# EAGLE board version 2 (EAGLE 6.1)
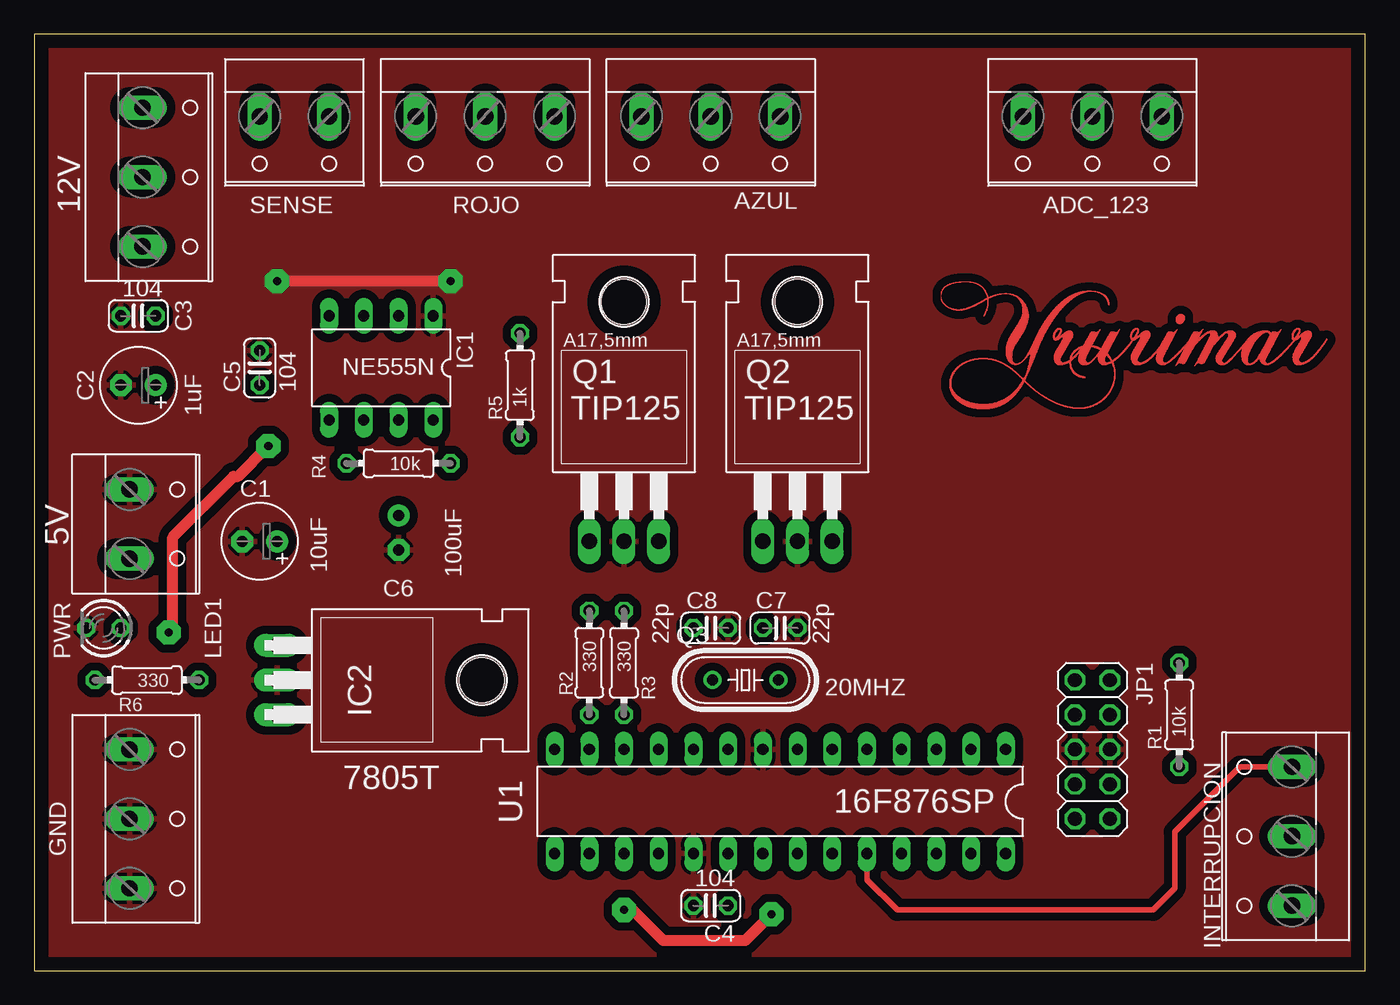
[diagram p0: board, top side]
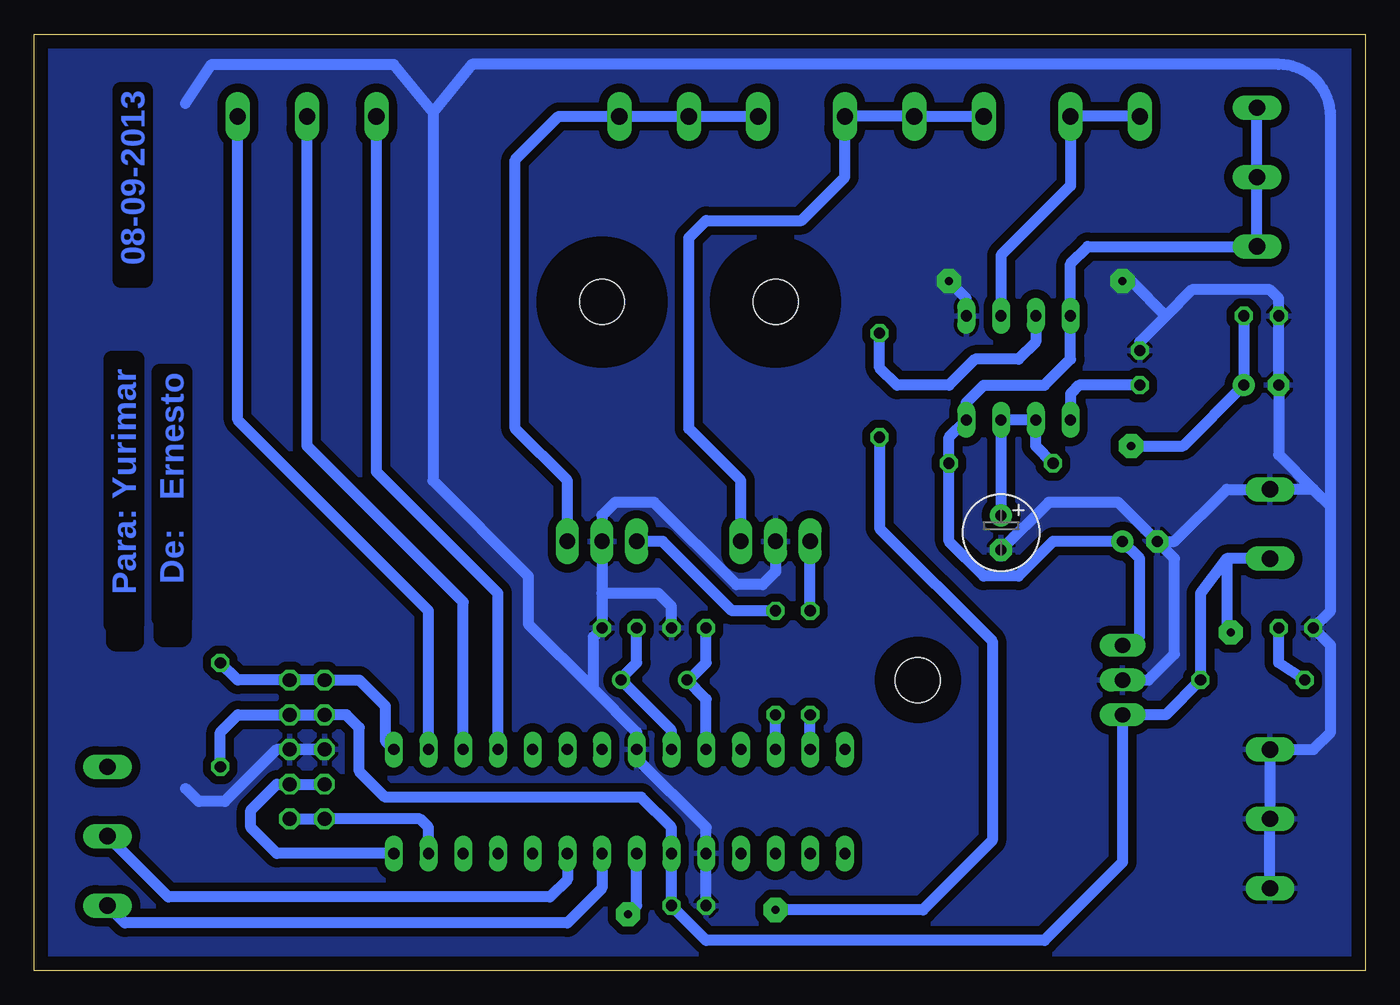
[diagram p1: board, bottom side, seen from below]

Size 97.45 x 68.57 mm. Coordinates in mm from the lower left corner, seen from the top.
Outline: 0,0 97.45,0 97.45,68.57 0,68.57 0,0
Copper layers (1*16): Top 0.035mm / dielectric 1.5mm / Bottom 0.035mm
Design rules: minimum track width 10mil, minimum drill 24mil, track to track 12mil, track to pad 12mil, pad to pad 12mil, via to via 12mil, smd to smd 12mil, copper to edge 40mil, drill to drill 8mil, minimum pad ring 10mil, minimum via ring 8mil, stop-mask expansion 4mil, vias tented up to drill 0mil, thermal gap 10mil

## Footprints (pad centres in the part's own frame; a part is rotated, then mirrored left to right if it is on the bottom)
W237-133 = drill 1.194 long: 1 -5.08,-0.635; 2 0,-0.635; 3 5.08,-0.635
E2,5-6 = drill 0.813 pad 1.6: + -1.27,0 | drill 0.813 pad 1.6 octagon: - 1.27,0
C025-024X044 = drill 0.813 octagon: 1 -1.27,0; 2 1.27,0
DIL08 = drill 0.813 long: 1 -3.81,-3.81; 2 -1.27,-3.81; 3 1.27,-3.81; 4 3.81,-3.81; 5 3.81,3.81; 6 1.27,3.81; 7 -1.27,3.81; 8 -3.81,3.81
TO220H = drill 1.118 long: 1 -2.54,-10.16; 2 0,-10.16; 3 2.54,-10.16 | hole 3.302: 0,4.826
2X05 = drill 1.016 octagon: 1 -5.08,-1.27; 2 -5.08,1.27; 3 -2.54,-1.27; 4 -2.54,1.27; 5 0,-1.27; 6 0,1.27; 7 2.54,-1.27; 8 2.54,1.27; 9 5.08,-1.27; 10 5.08,1.27
LED3MM = drill 0.813 octagon: A -1.27,0; K 1.27,0
W237-132 = drill 1.194 long: 1 -2.54,-0.635; 2 2.54,-0.635
TO220 = drill 1.118 long: 1 -2.54,-6.35; 2 0,-6.35; 3 2.54,-6.35 | hole 3.302: 0,11.176
HC49/S = drill 0.813: 1 -2.413,0; 2 2.413,0
0204/7 = drill 0.813 octagon: 1 -3.81,0; 2 3.81,0
DIL28-3 = drill 0.813 long: 1 -16.51,-3.81; 2 -13.97,-3.81; 3 -11.43,-3.81; 4 -8.89,-3.81; 5 -6.35,-3.81; 6 -3.81,-3.81; 7 -1.27,-3.81; 8 1.27,-3.81; 9 3.81,-3.81; 10 6.35,-3.81; 11 8.89,-3.81; 12 11.43,-3.81; 13 13.97,-3.81; 14 16.51,-3.81; 15 16.51,3.81; 16 13.97,3.81; 17 11.43,3.81; 18 8.89,3.81; 19 6.35,3.81; 20 3.81,3.81; 21 1.27,3.81; 22 -1.27,3.81; 23 -3.81,3.81; 24 -6.35,3.81; 25 -8.89,3.81; 26 -11.43,3.81; 27 -13.97,3.81; 28 -16.51,3.81

## Placement (x,y rotation side)
12V  [W237-133]  8.57,58.1 270 top
ADC_123  [W237-133]  77.47,61.91 180 top
AZUL  [W237-133]  49.53,61.91 180 top
C1  10uF  [E2,5-6]  16.51,31.43 180 top
C2  1uF  [E2,5-6]  7.62,42.86 180 top
C3  104  [C025-024X044]  7.62,47.94 180 top
C4  104  [C025-024X044]  49.53,4.76 180 top
C5  104  [C025-024X044]  16.51,44.13 90 top
C6  100uF  [E2,5-6]  26.67,32.07 270 bottom
C7  22p  [C025-024X044]  54.61,25.08 0 top
C8  22p  [C025-024X044]  49.53,25.08 0 top
GND  [W237-133]  7.62,11.11 270 top
IC1  NE555N  [DIL08]  25.4,44.13 180 top
IC2  7805T  [TO220H]  27.94,21.27 270 top
INTERRUPCION  [W237-133]  91.44,9.84 90 top
JP1  [2X05]  77.47,16.19 270 top
LED1  [LED3MM]  5.08,25.08 180 top
PWR  [W237-132]  7.62,32.7 270 top
Q1  TIP125  [TO220]  43.18,37.78 0 top
Q2  TIP125  [TO220]  55.88,37.78 0 top
Q3  20MHZ  [HC49/S]  52.07,21.27 0 top
R1  10k  [0204/7]  83.82,18.73 90 top
R2  330  [0204/7]  40.64,22.54 270 top
R3  330  [0204/7]  43.18,22.54 270 top
R4  10k  [0204/7]  26.67,37.15 180 top
R5  1k  [0204/7]  35.56,42.86 90 top
R6  330  [0204/7]  8.26,21.27 180 top
ROJO  [W237-133]  33.02,61.91 180 top
SENSE  [W237-132]  19.05,61.91 180 top
U1  16F876SP  [DIL28-3]  54.61,12.38 180 top

## Library data of the parts
12V ADC_123 AZUL GND INTERRUPCION PWR ROJO SENSE = con-wago-508; OC_FARNELL: unknown; OC_NEWARK: unknown
C1-C8 R1-R6 = rcl
IC1 = baiyun
IC2 = linear
JP1 = pinhead
LED1 = led
Q1 Q2 = transistor-pnp
Q3 = crystal; OC_FARNELL: 1667008; OC_NEWARK: unknown
U1 = -redpic-microchip-pic

## Nets
GND: C1.- C2.- C3.2 C4.2 C5.2 C6.- C7.2 C8.2 GND.1 GND.2 GND.3 IC1.1 IC2.2 JP1.5 JP1.6 LED1.K PWR.1 Q1.2 Q2.2 U1.8 U1.19
MCLR: JP1.1 JP1.2 R1.2 U1.1
N$1: C5.1 IC1.5
N$2: INTERRUPCION.3 U1.24
N$5: R2.2 U1.13
N$6: C6.+ IC1.6 IC1.7 R4.2
N$7: IC1.3 R5.2
N$8: R5.1 U1.21
N$9: Q1.1 R2.1
N$10: IC1.2 SENSE.1 SENSE.2
N$11: R3.2 U1.12
N$12: Q2.1 R3.1
N$13: INTERRUPCION.1 U1.22
N$14: INTERRUPCION.2 U1.23
N$16: ADC_123.1 U1.2
N$17: ADC_123.2 U1.3
N$18: ADC_123.3 U1.4
N$21: LED1.A R6.2
N$23: C7.1 Q3.2 U1.9
N$24: C8.1 Q3.1 U1.10
PWM_AZUL: AZUL.1 AZUL.2 AZUL.3 Q2.3
PWM_ROJO: Q1.3 ROJO.1 ROJO.2 ROJO.3
RB6: JP1.9 JP1.10 U1.27
RB7: JP1.7 JP1.8 U1.28
VCC: C2.+ C3.1 C4.1 IC2.3 JP1.3 JP1.4 PWR.2 R1.1 R6.1 U1.20
VDD: 12V.1 12V.2 12V.3 C1.+ IC1.4 IC1.8 IC2.1 R4.1

## Tracks (layer width: path | path; a pad name or v marks a point on that pad's centre or on a via)
GND  (via drill 0.6 pad 1.78)
  Top 0.813: v30.48,50.48 v17.78,50.48
  Bottom 0.813: C4.2 U1.19 48.26,10.48 53.34,15.56 U1.8 53.34,17.46 56.52,20.64 | JP1.6 JP1.5 79.69,16.19 83.5,12.38 85.41,12.38 86.36,13.34 | GND.3 GND.2 GND.1 3.81,16.19 2.54,17.46 2.54,23.81 LED1.K 2.54,26.35 2.54,33.97 | 3.81,35.24 PWR.1 10.16,35.24 13.97,31.43 C1.- | IC2.2 15.88,21.27 13.97,23.18 13.97,30.16 C1.- | 3.81,35.24 6.35,37.78 C2.- C3.2 6.35,49.21 6.99,49.85 12.7,49.85 14.61,47.94 | 14.61,47.94 16.51,46.04 C5.2 | IC1.1 29.21,49.21 v30.48,50.48 | v17.78,50.48 17.15,50.48 14.61,47.94 | 56.52,20.64 56.52,24.45 C7.2 55.88,27.62 | 55.88,27.62 Q2.2 55.88,33.34 54.93,34.29 52.07,34.29 46.04,28.26 44.13,28.26 43.18,29.21 Q1.2 | 86.36,63.5 84.46,66.36 71.12,66.36 68.26,62.87 | 68.26,62.87 68.26,35.88 61.28,28.89 61.28,25.4 56.52,20.64 | C8.2 50.8,26.67 51.75,27.62 55.88,27.62 | 3.81,35.24 2.54,33.97 | 2.54,33.97 2.54,62.55 arc-90 6.35,66.36 65.41,66.36 68.26,62.87 | C1.- 18.1,34.29 23.18,34.29 C6.-
  pour Bottom (isolate 0.61): 0,0 97.47,0 97.47,68.58 0,68.58
  pour Top (isolate 0.61): 0,0 97.47,0 97.47,68.58 0,68.58
MCLR
  Bottom 0.813: R1.2 82.55,21.27 JP1.2 JP1.1 73.66,21.27 71.76,19.37 71.76,16.83 U1.1
N$1
  Bottom 0.813: C5.1 20.96,42.86 21.59,42.23 IC1.5
N$2
  Top 0.406: INTERRUPCION.3 88.27,14.92 83.5,10.16 83.5,6.03 81.92,4.45 63.18,4.45 60.96,6.67 U1.24 60.96,8.89
N$3
  cutout Bottom: 92.08,24.13 92.08,42.86 arc90 91.44,43.18 90.17,43.18 arc90 89.53,42.86 89.53,24.13 arc90 90.17,23.49 91.44,23.49 arc90
N$4
  cutout Bottom: 88.58,24.45 88.58,42.92 arc90 87.68,44.13 87,44.13 arc90 86.04,42.86 86.04,24.45 arc90 86.68,23.81 87.95,23.81 arc90
N$5
  Bottom 0.813: U1.13 R2.2
N$6
  Bottom 0.813: R4.2 24.13,38.42 IC1.6 IC1.7 C6.+
N$7
  Bottom 0.813: IC1.3 24.13,46.04 25.4,44.77 28.58,44.77 30.48,42.86 34.29,42.86 35.56,44.13 R5.2
N$8  (via drill 0.6 pad 1.78)
  Top 0.813: v43.18,4.45 43.82,4.45 46.04,2.22 52.07,2.22 v53.98,4.13
  Bottom 0.813: R5.1 35.56,32.39 27.31,24.13 27.31,9.53 32.39,4.45 v43.18,4.45 | v53.98,4.13 53.34,4.76 U1.21
N$9
  Bottom 0.813: R2.1 Q1.1
N$10
  Bottom 0.813: SENSE.2 SENSE.1 21.59,57.47 26.67,52.39 IC1.2
N$11
  Bottom 0.813: U1.12 R3.2
N$12
  Bottom 0.813: R3.1 46.36,26.35 51.44,31.43 Q2.1
N$13
  Bottom 0.813: U1.22 55.88,6.03 58.42,3.49 90.81,3.49 INTERRUPCION.1
N$14
  Bottom 0.813: U1.23 58.42,6.67 59.69,5.4 87.63,5.4 INTERRUPCION.2
N$16
  Bottom 0.813: U1.2 68.58,26.35 82.55,40.32 ADC_123.1
N$17
  Bottom 0.813: U1.3 66.04,26.99 77.47,38.42 ADC_123.2
N$18
  Bottom 0.813: U1.4 63.5,27.62 72.39,36.51 ADC_123.3
N$21
  Bottom 0.813: R6.2 6.35,22.54 LED1.A
N$23
  Bottom 0.813: U1.9 50.8,17.59 Q3.2 54.48,21.4 53.34,22.54 C7.1
N$24
  Bottom 0.813: U1.10 48.26,19.88 Q3.1 49.53,21.27 48.26,22.54 C8.1
PWM_AZUL
  Bottom 0.813: Q2.3 58.42,35.88 62.23,39.69 62.23,59.37 59.06,62.55 AZUL.1 AZUL.2 AZUL.3
PWM_ROJO
  Bottom 0.813: Q1.3 45.72,35.88 49.53,39.69 49.53,53.66 48.26,54.93 41.28,54.93 38.1,58.1 ROJO.1 ROJO.2 ROJO.3
RB6
  Bottom 0.813: JP1.10 JP1.9 69.22,11.11 68.58,10.48 U1.27
RB7
  Bottom 0.813: U1.28 79.69,8.57 81.6,10.48 81.6,11.75 79.69,13.65 JP1.8 JP1.7
VCC  (via drill 0.6 pad 1.78)
  Top 0.813: v9.84,24.77 10.16,25.08 10.16,31.75 14.61,36.2 14.92,36.2 v17.15,38.42
  Bottom 0.813: R1.1 83.82,17.46 82.55,18.73 JP1.4 JP1.3 74.61,18.73 73.66,17.78 73.66,14.61 71.76,12.7 53.02,12.7 50.8,10.48 U1.20 C4.1 48.26,2.22 23.5,2.22 17.78,7.94 IC2.3 14.61,18.73 R6.1 12.07,27.62 10.16,30.16 | PWR.2 10.16,30.16 | C3.1 C2.+ 13.34,38.42 v17.15,38.42 | 10.16,30.16 10.16,25.08 v9.84,24.77
VDD
  Bottom 0.813: IC2.1 17.15,23.81 16.51,24.45 16.51,30.16 C1.+ 22.86,31.43 25.4,28.89 27.94,28.89 30.48,31.43 R4.1 30.48,39.05 IC1.8 29.21,41.59 27.94,42.86 23.5,42.86 21.59,44.77 IC1.4 21.59,51.75 20.32,53.02 12V.3 12V.2 12V.1
(copper drawn outside any net)
  shapes: Top area x6193

## Text on the board
Bottom: 08-09-2013 | Para: Yurimar | De: Ernesto
tNames: 5V